# EAGLE board cat layout fnl2 (EAGLE 6.5.0)
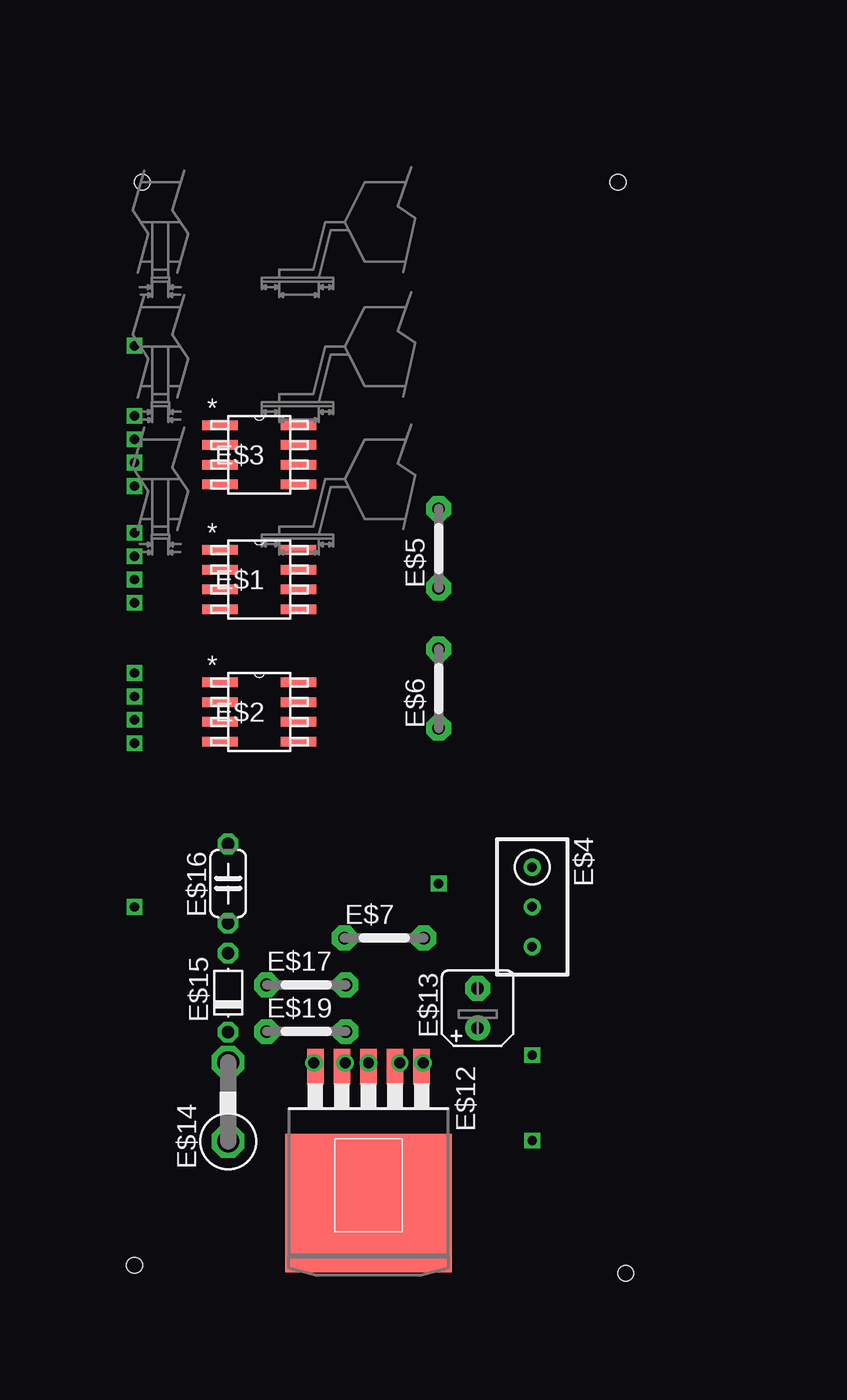
[diagram p0: board, top side]
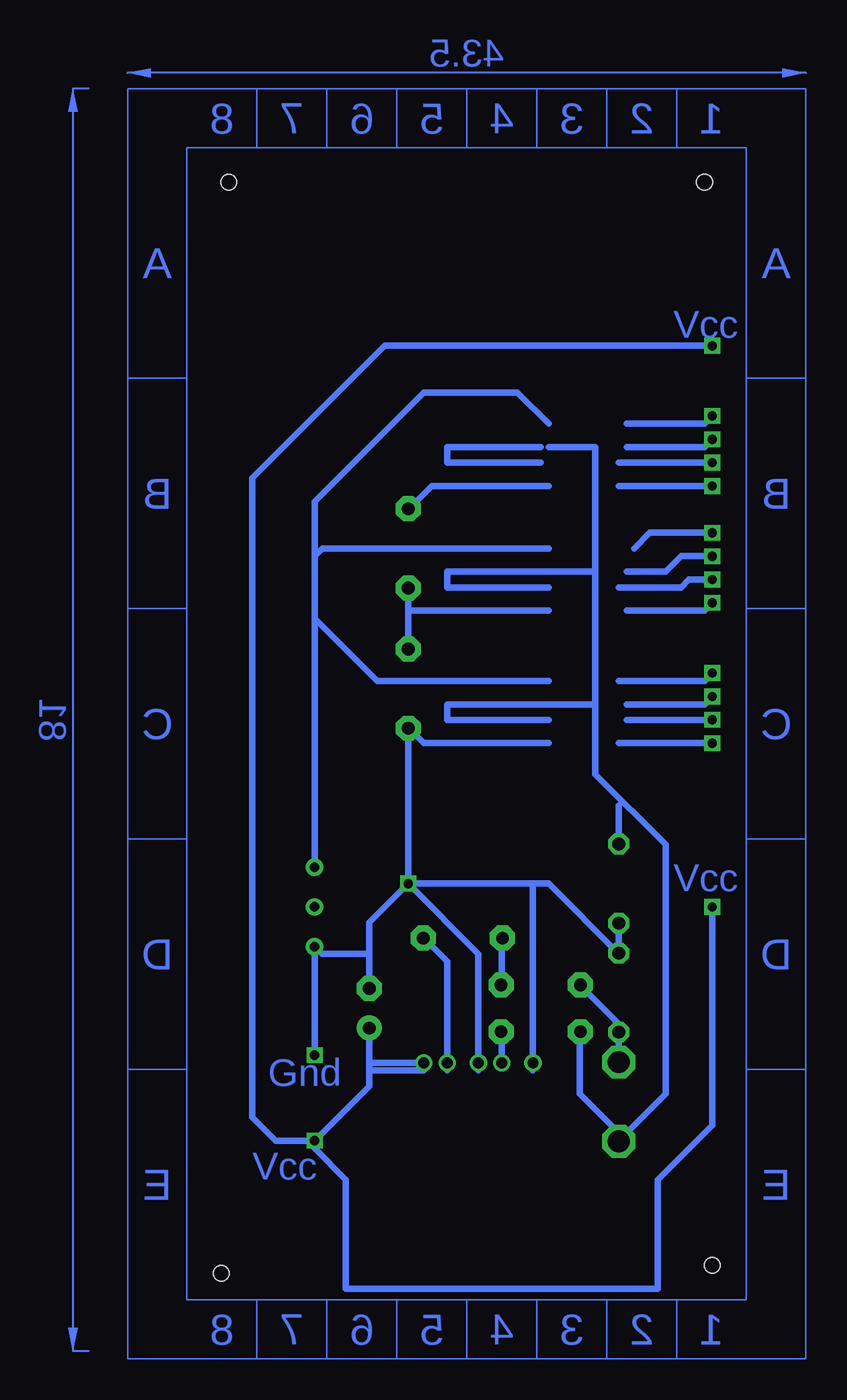
[diagram p1: board, bottom side, seen from below]

No outline drawn. Coordinates in mm, seen from the top.
Copper layers (1*16): Top 0.035mm / dielectric 1.5mm / Bottom 0.035mm
Design rules "default": minimum track width 10mil, minimum drill 24mil, track to track 8mil, track to pad 8mil, pad to pad 8mil, via to via 8mil, smd to smd 8mil, copper to edge 40mil, drill to drill 8mil, minimum pad ring 10mil, minimum via ring 8mil, stop-mask expansion 4mil, vias tented up to drill 0mil, thermal gap 10mil
Holes 1 mm at -4.5,95 26,95 26.5,25 -5,25.5

## Footprints (pad centres in the part's own frame; a part is rotated, then mirrored left to right if it is on the bottom)
M08A-M = smd 2.286 x 0.61: 1 -2.515,1.905; 2 -2.515,0.635; 3 -2.515,-0.635; 4 -2.515,-1.905; 5 2.515,-1.905; 6 2.515,-0.635; 7 2.515,0.635; 8 2.515,1.905
RTRIM3296W = drill 0.61: 1 0,-2.54; 2 0,0; 3 0,2.54
05 = drill 0.813 pad 1.6 octagon: 1 -2.54,0; 2 2.54,0
DDPAK5(Q) = smd 1.067 x 2.286: 1 -3.404,-8.763; 2 -1.702,-8.763; 3 0,-8.763; 4 1.702,-8.763; 5 3.404,-8.763 | smd 10.668 x 8.89: TAB 0,0
B45181A = drill 0.813 pad 1.6: + -1.27,0 | drill 0.813 pad 1.6 octagon: - 1.27,0
C1702-05 = drill 1.397 octagon: A 2.54,0; C -2.54,0
D-5 = drill 0.813 octagon: A 2.54,0; C -2.54,0
C050-024X044 = drill 0.813 octagon: 1 -2.54,0; 2 2.54,0

## Placement (x,y rotation side)
E$1  [M08A-M]  3,69.5 0 top
E$2  [M08A-M]  3,61 0 top
E$3  [M08A-M]  3,77.5 0 top
E$4  [RTRIM3296W]  20.5,48.5 180 top
E$5  [05]  14.5,71.5 90 top
E$6  [05]  14.5,62.5 90 top
E$7  [05]  11,46.5 0 top
E$12  [DDPAK5(Q)]  10,29.5 180 top
E$13  [B45181A]  17,42 90 top
E$14  [C1702-05]  1,36 90 top
E$15  [D-5]  1,43 90 top
E$16  [C050-024X044]  1,50 90 top
E$17  [05]  6,43.5 0 top
E$19  [05]  6,40.5 0 top

## Library data of the parts
E$1-E$3 = catlm
E$4 E$13-E$15 = ref-packages-longpad
E$5-E$7 E$17 E$19 = Misc
E$12 = PowerProducts
E$16 = PAsystem

## Tracks (layer width: path | path; a pad name or v marks a point on that pad's centre or on a via)
S$1
  Bottom 0.406: 5.5,79.5 7.5,81.5 13.5,81.5 20.5,74.5 20.5,71 | 20.5,71 20.5,67 | 20.5,67 20.5,51 | 5.5,71.5 20,71.5 20.5,71 | 5.5,63 16.5,63 20.5,67
S$2
  Bottom 0.406: 3.5,40.5 3.5,36.5 1,34 1,33.5 -2,36.5 -2,52.5 2.5,57 2.5,61.5 | 2.5,61.5 2.5,62 2.5,70 | 2.5,70 2.5,78 5.5,78 | 2.5,70 12,70 12,69 5.5,69 | 2.5,61.5 12,61.5 12,60.5 5.5,60.5
S$3
  Bottom 0.406: 5.5,75.5 13,75.5 14.5,74
S$4
  Bottom 0.406: 5.5,67.5 14.5,67.5 | 14.5,67.5 14.5,69 | 14.5,67.5 14.5,65.5 15,65
S$5
  Bottom 0.406: 1,55 1,52.5
S$6  (via drill 0.6)
  Bottom 0.406: v-5,80 -4.5,79.5 0.5,79.5
S$7
  Bottom 0.406: 6,78 12,78 12,77 6,77
S$8  (via drill 0.6, 0.7)
  Bottom 0.406: v-5,48.5 -5,34.5 -1.5,31 -1.5,24 18.5,24 18.5,31 20.5,33 v20.5,33.5 | v-5,84.5 16,84.5 24.5,76 24.5,35 23,33.5 v20.5,33.5 | v13.5,38.5 17,38.5 | 17,41 17,38.5 | 17,38.5 17,38 | 17,38 17,37 v20.5,33.5 | 13.5,38 17,38
S$10  (via drill 0.6)
  Bottom 0.406: v-5,77 1,77
S$11  (via drill 0.6)
  Bottom 0.406: v-5,75.5 1,75.5
S$13  (via drill 0.6)
  Bottom 0.406: v-5,72.5 -1,72.5 0,71.5
S$14  (via drill 0.6)
  Bottom 0.406: v-5,71 -3,71 -2,70 0.5,70
S$15  (via drill 0.6)
  Bottom 0.406: v-5,69.5 -3.5,69.5 -3,69 1,69
S$16  (via drill 0.6)
  Bottom 0.406: v-5,68 -4.5,67.5 0.5,67.5
S$19  (via drill 0.6)
  Bottom 0.406: v-5,63.5 -4.5,63 1,63
S$20  (via drill 0.6)
  Bottom 0.406: v-5,78.5 -4.5,78 0.5,78
S$21
  Bottom 0.406: 3.5,43.5 1,41 1,38.5
S$22  (via drill 0.6, 0.7)
  Bottom 0.406: 6.5,50 v6.5,38.5 6.5,38 | 5.5,59 13.5,59 14.5,60 v14.5,50 | 1,47.5 1,45.5 5.5,50 6.5,50 | 6.5,50 v14.5,50 | 17,45.5 17,43 | 17,45.5 20,45.5 20.5,46 v20.5,39 | v14.5,50 17,47.5 17,45.5 | 10,38 v10,38.5 10,45.5 v14.5,50
S$23  (via drill 0.6)
  Bottom 0.406: v-5,62 -4.5,61.5 0.5,61.5
S$24
  Bottom 0.406: 8.5,46.5 8.5,43.5
S$25  (via drill 0.7)
  Bottom 0.406: 8.5,40.5 v8.5,38.5
S$26  (via drill 0.7)
  Bottom 0.406: 13.5,46.5 12,45 v12,38.5 12,38
S$27  (via drill 0.6)
  Bottom 0.406: v-5,60.5 0.5,60.5
S$28  (via drill 0.6)
  Bottom 0.406: v-5,59 1,59
(copper drawn outside any net)
  shapes: Bottom area x3

## Text on the board
Bottom: Vcc | Vcc | Gnd | Vcc